# EAGLE board Panel (EAGLE 9.6.0)
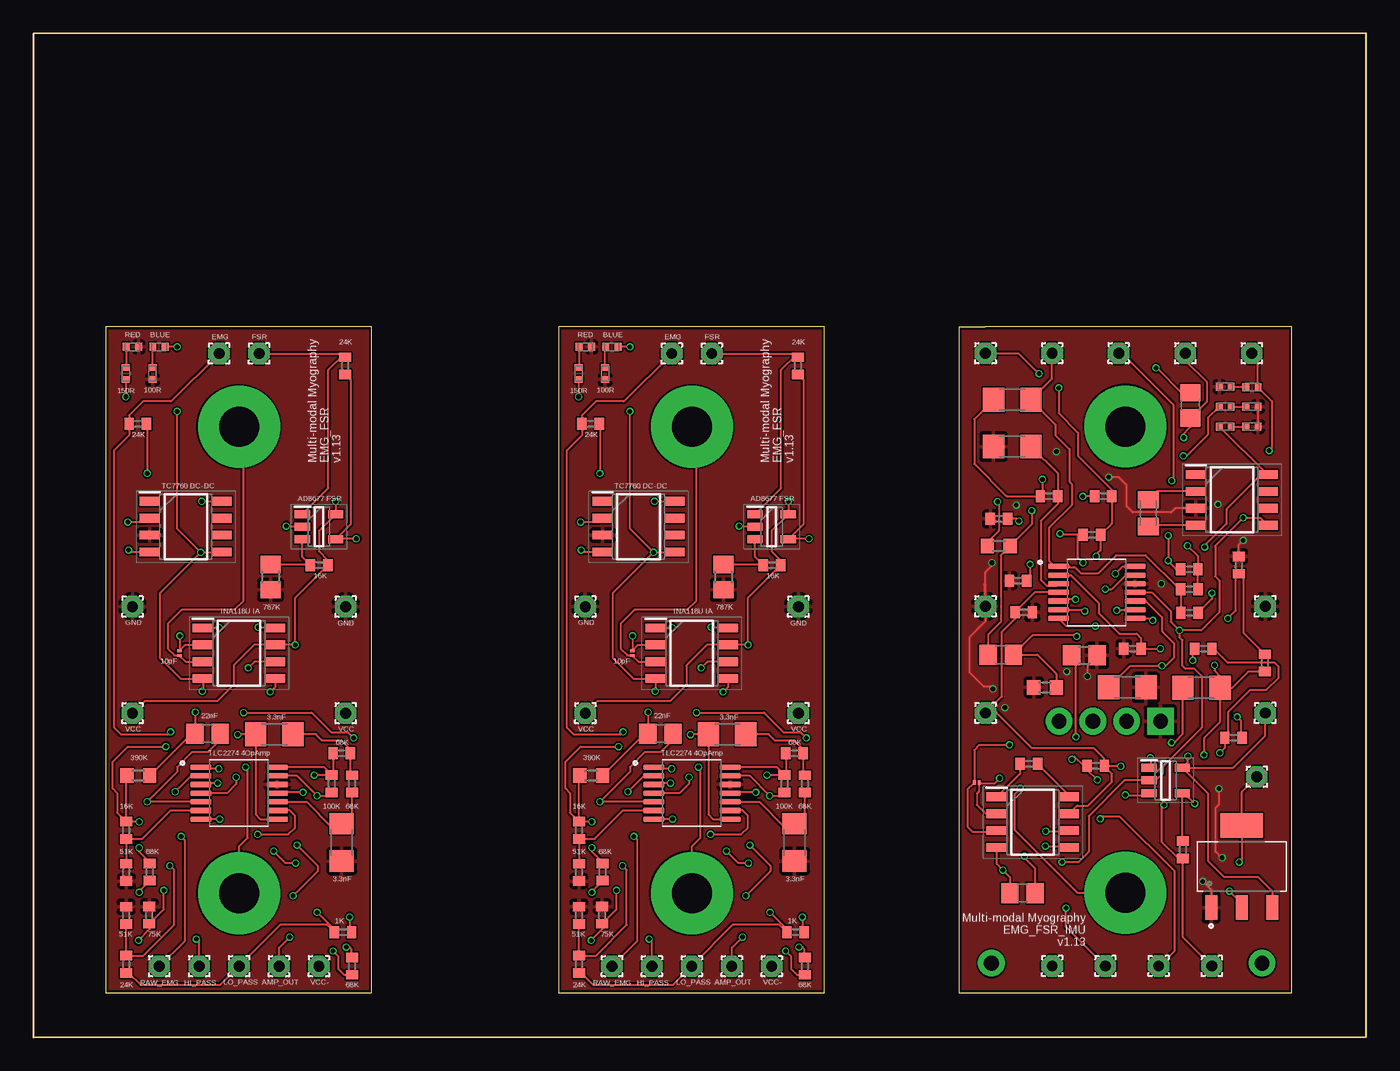
[diagram p0: board, top side]
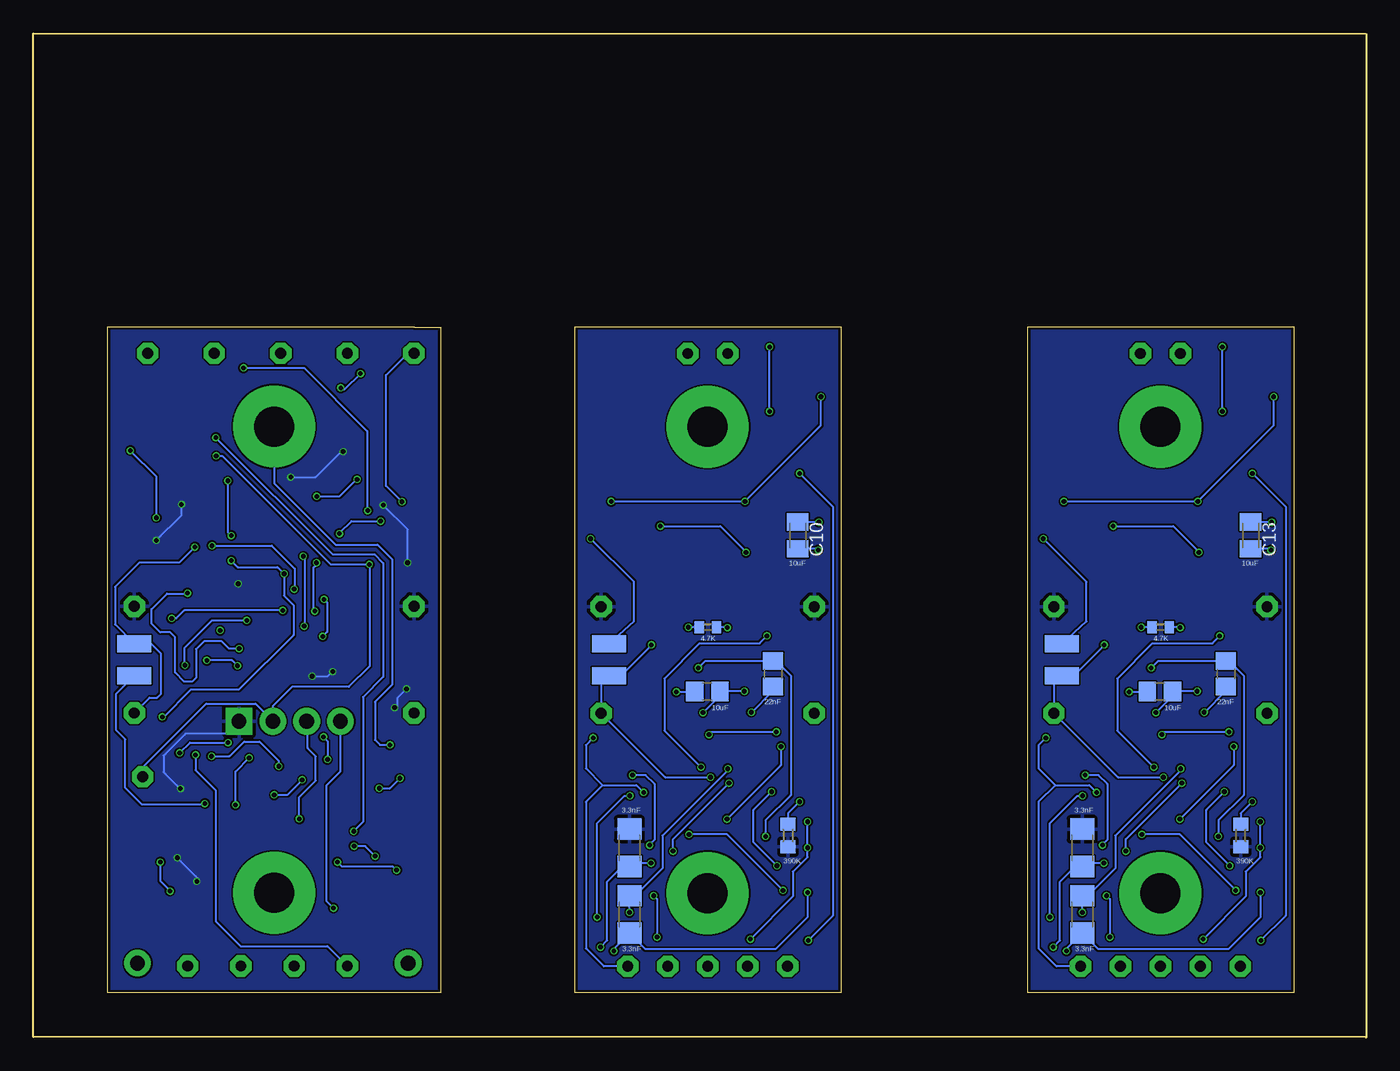
[diagram p1: board, bottom side, seen from below]

Size 100.09 x 75.38 mm. Coordinates in mm from the lower left corner, seen from the top.
Outline: 0,0 100.09,0.05 100.09,75.38 0,75.33 0,0
Outline: 5.45,3.34 25.4,3.34 25.4,53.34 5.45,53.34 5.45,3.34
Outline: 39.45,3.34 59.4,3.34 59.4,53.34 39.45,53.34 39.45,3.34
Outline: 69.5,3.36 94.5,3.36 94.5,53.36 71.5,53.36 71.47,53.33 69.5,53.33 69.5,3.36
Copper layers (1*16): Top 0.035559375mm / dielectric 1.6mm / Bottom 0.035559375mm
Design rules "jlcpcb2layer": minimum track width 5mil, minimum drill 12mil, track to track 5mil, track to pad 5mil, pad to pad 5mil, via to via 5mil, smd to smd 5mil, copper to edge 8mil, drill to drill 6mil, minimum pad ring 5mil, minimum via ring 3mil, stop-mask expansion 2.5mil, vias tented up to drill 0mil, thermal gap 10mil

## Footprints (pad centres in the part's own frame; a part is rotated, then mirrored left to right if it is on the bottom)
1,6/0,8 = drill 0.813 pad 1.6 octagon: 1 0,0
RESC0402X40N = smd 0.51 x 0.6: 1 -0.465,0; 2 0.465,0
HPC0201 = smd 0.2 x 0.35: 1 -0.18,0; 2 0.18,0
C0805 = smd 1.3 x 1.5: 1 -0.95,0; 2 0.95,0
C1206 = smd 1.6 x 1.8: 1 -1.4,0; 2 1.4,0
C0805K = smd 1.3 x 1.6: 1 -1,0; 2 1,0
C0402 = smd 0.7 x 0.9: 1 -0.65,0; 2 0.65,0
SOIC127P600X175-8N = smd 1.5 x 0.65: 1 -2.7,1.905; 2 -2.7,0.635; 3 -2.7,-0.635; 4 -2.7,-1.905; 5 2.7,-1.905; 6 2.7,-0.635; 7 2.7,0.635; 8 2.7,1.905
SOT95P280X100-5N = smd 1.15 x 0.6: 1 -1.25,0.95; 2 -1.25,0; 3 -1.25,-0.95; 4 1.25,-0.95; 5 1.25,0.95
SOIC127P600X175-8N' = smd 1.528 x 0.65: 1 -2.711,1.905; 2 -2.711,0.635; 3 -2.711,-0.635; 4 -2.711,-1.905; 5 2.711,-1.905; 6 2.711,-0.635; 7 2.711,0.635; 8 2.711,1.905
IMU = drill 1.1 pad 2: +3.3V -14.097,0; P$1 4.064,10.16; P$2 4.064,-10.16; SCL -14.097,-5.08; SDA -14.097,-2.54 | drill 1.1 pad 2 square: GND -14.097,2.54
SMD1,27-2,54 = smd 1.27 x 2.54: 1 0,0
R0402 = smd 0.7 x 0.9: 1 -0.65,0; 2 0.65,0
R0805 = smd 1.3 x 1.5: 1 -0.95,0; 2 0.95,0
R1005 = smd 0.7 x 0.9: 1 -0.65,0; 2 0.65,0
R0603 = smd 1 x 1.1: 1 -0.85,0; 2 0.85,0
RESC1005X40N = smd 0.51 x 0.6: 1 -0.445,0; 2 0.445,0
SOT230P700X180-4N = smd 1.86 x 0.9: 1 -3.075,2.3; 2 -3.075,0; 3 -3.075,-2.3 | smd 1.86 x 3.19: 4 3.075,0
SOP65P640X120-14N = smd 1.57 x 0.41: 1 -2.87,1.95; 2 -2.87,1.3; 3 -2.87,0.65; 4 -2.87,0; 5 -2.87,-0.65; 6 -2.87,-1.3; 7 -2.87,-1.95; 8 2.87,-1.95; 9 2.87,-1.3; 10 2.87,-0.65; 11 2.87,0; 12 2.87,0.65; 13 2.87,1.3; 14 2.87,1.95
EMG_VIA = drill 3 pad 6.15: P$1 0,0

## Placement (x,y rotation side)
+3.3V1  [1,6/0,8]  91.88,19.57 0 top
AMP_OUT  [1,6/0,8]  18.45,5.34 0 top
AMP_OUT1  [1,6/0,8]  52.45,5.34 0 top
AMP_OUT4  [1,6/0,8]  81.5,51.36 0 top
BLUE  RESC0402X40N  [RESC0402X40N]  9.45,51.84 0 top
BLUE1  RESC0402X40N  [RESC0402X40N]  43.45,51.84 0 top
BLUE4  RESC0402X40N  [RESC0402X40N]  91.5,48.81 0 top
C1  10pF  [HPC0201]  10.97,28.85 270 top
C2  10uF  [C0805]  15.48,25.97 180 bottom
C3  10pF  [HPC0201]  44.97,28.85 270 top
C4  3.3nF  [C1206]  21.32,9.24 90 bottom
C5  3.3nF  [C1206]  21.33,14.24 270 bottom
C6  22nF  [C0805]  13.09,22.81 0 top
C7  22nF  [C0805]  10.53,27.3 270 bottom
C8  3.3nF  [C1206]  23.17,14.64 270 top
C9  3.3nF  [C1206]  18.1,22.77 180 top
C10  10uF  [C0805K]  42.68,37.69 270 bottom
C11  10uF  [C0805]  49.48,25.97 180 bottom
C12  3.3nF  [C1206]  55.32,9.24 90 bottom
C13  10uF  [C0805K]  8.68,37.69 270 bottom
C14  3.3nF  [C1206]  55.33,14.24 270 bottom
C15  22nF  [C0805]  47.09,22.81 0 top
C16  22nF  [C0805]  44.53,27.3 270 bottom
C17  3.3nF  [C1206]  57.17,14.64 270 top
C18  3.3nF  [C1206]  52.1,22.77 180 top
C39  10pF  [HPC0201]  70.84,19.13 180 top
C40  1uF  [C0402]  73.94,34.29 180 top
C41  1uF  [C0402]  74.37,31.91 0 top
C42  10uF  [C0805K]  83.72,39.36 270 top
C43  10uF  [C0805]  74.28,10.83 0 top
C44  3.3nF  [C1206]  73.5,47.86 0 top
C45  3.3nF  [C1206]  73.5,44.36 0 top
C46  22nF  [C0805]  72.64,28.73 0 top
C47  22nF  [C0805]  86.89,47.45 90 top
C48  3.3nF  [C1206]  82.16,26.28 0 top
C49  3.3nF  [C1206]  87.72,26.25 0 top
EMG_BASIC  [1,6/0,8]  13.95,51.34 0 top
EMG_BASIC1  [1,6/0,8]  47.95,51.34 0 top
EMG_OUT1  [1,6/0,8]  76.5,5.36 0 top
FSR_OUT  [1,6/0,8]  16.95,51.34 0 top
FSR_OUT1  [1,6/0,8]  50.95,51.34 0 top
FSR_OUT4  [1,6/0,8]  88.5,5.36 0 top
GND  0V  [1,6/0,8]  7.45,32.34 0 top
GND1  0V  [1,6/0,8]  23.45,32.34 0 top
GND2  0V  [1,6/0,8]  41.45,32.34 0 top
GND3  0V  [1,6/0,8]  57.45,32.34 0 top
GND8  0V  [1,6/0,8]  71.5,32.36 0 top
GND9  0V  [1,6/0,8]  92.5,32.36 0 top
HI_PASS  [1,6/0,8]  12.45,5.34 0 top
HI_PASS1  [1,6/0,8]  46.45,5.34 0 top
HI_PASS4  [1,6/0,8]  71.5,51.36 0 top
IC1  TC7660SEOA  [SOIC127P600X175-8N]  11.45,38.34 0 top
IC2  AD8677AUJZ-REEL7  [SOT95P280X100-5N]  21.45,38.34 0 top
IC3  INA118U_2K5  [SOIC127P600X175-8N']  15.45,28.84 0 top
IC4  TC7660SEOA  [SOIC127P600X175-8N]  45.45,38.34 0 top
IC5  AD8677AUJZ-REEL7  [SOT95P280X100-5N]  55.45,38.34 0 top
IC6  INA118U_2K5  [SOIC127P600X175-8N']  49.45,28.84 0 top
IC13  TC7660SEOA  [SOIC127P600X175-8N]  90,40.36 0 top
IC14  AD8677AUJZ-REEL7  [SOT95P280X100-5N]  85.03,19.3 0 top
IC15  INA118U_2K5  [SOIC127P600X175-8N']  75.06,16.16 0 top
IMU1  IMU  [IMU]  82.11,9.64 270 top
LO_PASS  [1,6/0,8]  15.45,5.34 0 top
LO_PASS1  [1,6/0,8]  49.45,5.34 0 top
LO_PASS4  [1,6/0,8]  76.5,51.36 0 top
ORANGE1  RESC0402X40N  [RESC0402X40N]  91.5,47.36 0 top
PAD1  [SMD1,27-2,54]  22.85,29.54 270 bottom
PAD2  [SMD1,27-2,54]  22.85,27.14 90 bottom
PAD3  [SMD1,27-2,54]  56.85,29.54 270 bottom
PAD4  [SMD1,27-2,54]  56.85,27.14 90 bottom
PAD9  [SMD1,27-2,54]  92.5,27.16 270 bottom
PAD10  [SMD1,27-2,54]  92.5,29.56 270 bottom
R1  75K  [R0402]  8.72,9.18 270 top
R2  51K  [R0402]  6.97,9.16 270 top
R3  787K  [R0805]  17.82,34.56 270 top
R4  4.7K  [R0402]  15.44,30.81 180 bottom
R5  75K  [R0402]  42.72,9.18 270 top
R6  51K  [R0402]  6.98,12.39 90 top
R7  100K  [R1005]  22.42,19.05 270 top
R8  16K  [R0402]  21.47,35.46 0 top
R9  16K  [R0402]  6.97,15.55 270 top
R10  68K  [R0402]  8.73,12.42 90 top
R11  390K  [R0603]  9.42,15.16 90 bottom
R12  390K  [R0603]  7.89,19.66 0 top
R13  1K  [R0402]  23.25,7.91 0 top
R14  68K  [R0402]  23.93,5.36 90 top
R15  68K  [R0402]  42.73,12.42 90 top
R16  390K  [R0603]  43.42,15.16 90 bottom
R17  68K  [R0402]  23.16,21.32 180 top
R18  390K  [R0603]  41.89,19.66 0 top
R19  ERJ-2RKF1500X  [RESC1005X40N]  8.95,49.84 270 top
R20  1K  [R0402]  57.25,7.91 0 top
R21  24K  [R0402]  6.98,5.5 90 top
R22  ERJ-2RKF1500X  [RESC1005X40N]  6.95,49.84 270 top
R23  68K  [R0402]  57.93,5.36 90 top
R24  24K  [R0402]  23.42,50.41 270 top
R25  24K  [R0402]  7.85,46.06 0 top
R26  68K  [R0402]  23.93,19.03 90 top
R27  68K  [R0402]  57.16,21.32 180 top
R28  ERJ-2RKF1500X  [RESC1005X40N]  42.95,49.84 270 top
R29  51K  [R0402]  40.97,9.16 270 top
R30  24K  [R0402]  40.98,5.5 90 top
R31  ERJ-2RKF1500X  [RESC1005X40N]  40.95,49.84 270 top
R32  24K  [R0402]  57.42,50.41 270 top
R33  24K  [R0402]  41.85,46.06 0 top
R34  68K  [R0402]  57.93,19.03 90 top
R35  787K  [R0805]  51.82,34.56 270 top
R36  4.7K  [R0402]  49.44,30.81 180 bottom
R37  51K  [R0402]  40.98,12.39 90 top
R38  100K  [R1005]  56.42,19.05 270 top
R39  16K  [R0402]  55.47,35.46 0 top
R40  16K  [R0402]  40.97,15.55 270 top
R82  75K  [R0402]  90.53,35.46 270 top
R83  68K  [R0402]  80.33,40.63 0 top
R84  390K  [R0603]  75.97,26.28 0 top
R85  390K  [R0603]  72.5,36.88 0 top
R86  1K  [R0402]  86.81,33.63 0 top
R87  68K  [R0402]  76.28,40.63 0 top
R88  68K  [R0402]  90.13,22.5 0 top
R89  ERJ-2RKF1500X  [RESC1005X40N]  89.5,48.86 180 top
R90  51K  [R0402]  82.53,29.18 0 top
R91  24K  [R0402]  86.81,31.88 0 top
R92  ERJ-2RKF1500X  [RESC1005X40N]  89.5,45.86 180 top
R93  ERJ-2RKF1500X  [RESC1005X40N]  89.5,47.36 180 top
R94  24K  [R0402]  86.33,14.09 90 top
R95  24K  [R0402]  92.48,28.11 90 top
R96  68K  [R0402]  87.84,29.18 0 top
R97  787K  [R0805]  78.92,28.69 0 top
R98  4.7K  [R0402]  74.77,20.53 0 top
R99  51K  [R0402]  72.5,38.93 0 top
R100  100K  [R1005]  86.8,35.13 0 top
R101  16K  [R0402]  79.78,20.38 0 top
R102  16K  [R0402]  79.5,37.73 180 top
RAWEMG  [1,6/0,8]  9.45,5.34 0 top
RAWEMG1  [1,6/0,8]  43.45,5.34 0 top
RAWEMG4  [1,6/0,8]  86.5,51.36 0 top
RED  RESC0402X40N  [RESC0402X40N]  7.45,51.84 0 top
RED1  RESC0402X40N  [RESC0402X40N]  41.45,51.84 0 top
RED4  RESC0402X40N  [RESC0402X40N]  91.5,45.86 0 top
SCL1  [1,6/0,8]  80.5,5.36 0 top
SDA1  [1,6/0,8]  84.5,5.36 0 top
U2  AZ1117EH-3.3TRG1  [SOT230P700X180-4N]  90.75,12.83 90 top
U$1  TLC2274-HT  [SOP65P640X120-14N]  15.45,18.34 0 top
U$2  EMG_VIA  [EMG_VIA]  15.45,10.84 0 top
U$3  EMG_VIA  [EMG_VIA]  15.45,45.84 0 top
U$4  TLC2274-HT  [SOP65P640X120-14N]  49.45,18.34 0 top
U$5  EMG_VIA  [EMG_VIA]  49.45,10.84 0 top
U$6  EMG_VIA  [EMG_VIA]  49.45,45.84 0 top
U$13  TLC2274-HT  [SOP65P640X120-14N]  79.86,33.41 0 top
U$14  EMG_VIA  [EMG_VIA]  82,10.86 0 top
U$15  EMG_VIA  [EMG_VIA]  82,45.86 0 top
VCC  +5V  [1,6/0,8]  7.45,24.34 0 top
VCC1  +5V  [1,6/0,8]  23.45,24.34 0 top
VCC2  +5V  [1,6/0,8]  41.45,24.34 0 top
VCC3  +5V  [1,6/0,8]  57.45,24.34 0 top
VCC8  +5V  [1,6/0,8]  71.5,24.36 0 top
VCC9  +5V  [1,6/0,8]  92.5,24.36 0 top
VCC-  -5V  [1,6/0,8]  21.45,5.34 0 top
VCC-1  -5V  [1,6/0,8]  55.45,5.34 0 top
VCC-4  -5V  [1,6/0,8]  91.5,51.36 0 top

## Library data of the parts
+3.3V1 AMP_OUT AMP_OUT1 AMP_OUT4 EMG_BASIC EMG_BASIC1 EMG_OUT1 FSR_OUT FSR_OUT1 FSR_OUT4 GND GND1-GND3 GND8 GND9 HI_PASS HI_PASS1 HI_PASS4 LO_PASS LO_PASS1 LO_PASS4 PAD1-PAD4 PAD9 PAD10 RAWEMG RAWEMG1 RAWEMG4 SCL1 SDA1 VCC VCC1-VCC3 VCC8 VCC9 VCC- VCC-1 VCC-4 = wirepad
BLUE BLUE1 BLUE4 ORANGE1 RED RED1 RED4 = RESC0402X40N; A_MAX: 0.4; A_MIN: 0.4; A_NOM: 0.4; D_MAX: 1.1; D_MIN: 0.95; D_NOM: 1.0; E_MAX: 0.55; E_MIN: 0.45; E_NOM: 0.5; L1_MAX: 0.3; L1_MIN: 0.15; L1_NOM: 0.25; L_MAX: 0.3; L_MIN: 0.15; L_NOM: 0.25; MANUFACTURER: KOA; STANDARD: IPC 7351B
C1-C3 C10 C11 C13 C39-C49 = rcl; SPICEPREFIX: C
C4-C9 C12 C14-C18 = rcl@1; SPICEPREFIX: C
IC1 IC4 IC13 = TC7660SEOA; ARROW_PART_NUMBER: TC7660SEOA; ARROW_PRICE-STOCK: https://www.arrow.com/en/products/tc7660seoa/microchip-technology; DESCRIPTION: DC-TO-DC VOLTAGE CONVERTER; HEIGHT: 1.75mm; MANUFACTURER_NAME: Microchip; MANUFACTURER_PART_NUMBER: TC7660SEOA; MOUSER_PART_NUMBER: 579-TC7660SEOA; MOUSER_PRICE-STOCK: https://www.mouser.co.uk/ProductDetail/Microchip-Technology/TC7660SEOA?qs=cQYLKLPzRJl3hJI5k2EAHg%3D%3D
IC2 IC5 IC14 = AD8677AUJZ-REEL7; ARROW_PART_NUMBER: AD8677AUJZ-REEL7; ARROW_PRICE-STOCK: https://www.arrow.com/en/products/ad8677aujz-reel7/analog-devices; DESCRIPTION: Precision Amplifiers 130uV Max Offset VTG; HEIGHT: 1mm; MANUFACTURER_NAME: Analog Devices; MANUFACTURER_PART_NUMBER: AD8677AUJZ-REEL7; MOUSER_PART_NUMBER: 584-AD8677AUJZ-R7; MOUSER_PRICE-STOCK: https://www.mouser.co.uk/ProductDetail/Analog-Devices/AD8677AUJZ-REEL7?qs=%2FtpEQrCGXCxIKHu%2FfOAijA%3D%3D
IC3 IC6 IC15 = INA118U_2K5; ARROW_PART_NUMBER: INA118U/2K5; ARROW_PRICE-STOCK: https://www.arrow.com/en/products/ina118u2k5/texas-instruments; DESCRIPTION: Precision, Low Power Instrumentation Amplifier; HEIGHT: 1.75mm; MANUFACTURER_NAME: Texas Instruments; MANUFACTURER_PART_NUMBER: INA118U/2K5; MOUSER_PART_NUMBER: 595-INA118U/2K5; MOUSER_PRICE-STOCK: https://www.mouser.co.uk/ProductDetail/Texas-Instruments/INA118U-2K5?qs=VBduBm9rCJRVtE6eJbSA%2Fg%3D%3D
IMU1 = IMU
R1 R2 R5 R6 R8-R10 R13-R15 R17 R20 R21 R23-R27 R29 R30 R32-R34 R37 R39 R40 R82-R84 R86-R88 R90 R91 R94-R96 R99 R101 R102 = adafruit
R3 R35 = rcl@1; SPICEPREFIX: R
R4 R7 R12 R18 R36 R38 = adafruit@2
R11 R16 R85 R98 R100 = adafruit@1
R19 R22 R28 R31 R89 R92 R93 = ERJ-2RKF1500X; DESCRIPTION: 150 Ohms ±1% 0.1W, 1/10W Chip Resistor 0402 (1005 Metric) Automotive AEC-Q200 Thick Film; DIGI-KEY_PART_NUMBER: P150LCT-ND; MF: Panasonic Electronic; MP: ERJ-2RKF1500X; PACKAGE: 1005 Panasonic Electronic Components; PURCHASE-URL: https://pricing.snapeda.com/search/part/ERJ-2RKF1500X/?ref=eda
R97 = rcl; SPICEPREFIX: R
U2 = AZ1117EH-3.3TRG1; DESCRIPTION: Linear Voltage Regulator IC 1 Output 1A SOT-223; DIGI-KEY_PART_NUMBER: AZ1117EH-3.3TRG1DICT-ND; MF: Diodes Inc.; MP: AZ1117EH-3.3TRG1; PACKAGE: SOT-223 Diodes Inc.; PURCHASE-URL: https://pricing.snapeda.com/search/part/AZ1117EH-3.3TRG1/?ref=eda
U$1 U$4 U$13 = TLC2274-HT
U$2 U$3 U$5 U$6 U$14 U$15 = EMG_VIA

## Nets
+3.3V1: +3.3V1.1 C40.1 IMU1.+3.3V R93.2 U2.2 U2.4
+5V: IC1.8 IC2.5 IC3.7 PAD2.1 R8.2 R22.2 U$1.4 VCC1.1 VCC.1
+5V1: IC4.8 IC5.5 IC6.7 PAD4.1 R31.2 R39.2 U$4.4 VCC2.1 VCC3.1
+5V4: C41.1 IC13.8 IC14.5 IC15.7 PAD10.1 R92.2 R101.2 U2.3 U$13.4 VCC8.1 VCC9.1
-5V: BLUE.2 C2.1 IC1.5 IC2.2 IC3.4 U$1.11 VCC-.1
-5V1: BLUE1.2 C11.1 IC4.5 IC5.2 IC6.4 U$4.11 VCC-1.1
-5V4: BLUE4.2 C43.1 IC13.5 IC14.2 IC15.4 U$13.11 VCC-4.1
EMG_BASIC: C9.2 EMG_BASIC.1 R25.1 U$1.8
EMG_BASIC1: C18.2 EMG_BASIC1.1 R33.1 U$4.8
EMG_BASIC4: C49.2 EMG_OUT1.1 R95.1 U$13.8
FSR_OUT: FSR_OUT.1 IC2.1 R24.1
FSR_OUT1: FSR_OUT1.1 IC5.1 R32.1
FSR_OUT4: FSR_OUT4.1 IC14.1 R94.1
GND: C5.1 C8.2 GND1.1 GND.1 IC1.3 R1.1 R2.1 R3.2 R6.1 R11.1 R19.2 RED.2 U$1.12
GND1: C14.1 C17.2 GND2.1 GND3.1 IC4.3 R5.1 R16.1 R28.2 R29.1 R35.2 R37.1 RED1.2 U$4.12
GND4: C40.2 C41.2 C45.1 C48.2 GND8.1 GND9.1 IC13.3 IMU1.GND ORANGE1.2 R82.1 R84.1 R89.2 R90.1 R97.2 R99.1 RED4.2 U2.1 U$13.12
N$1: C13.1 IC1.2
N$2: C13.2 IC1.4
N$3: C1.1 IC3.2 U$2.P$1
N$4: R22.1 RED.1
N$5: C1.2 IC3.3 U$3.P$1
N$6: BLUE.1 R19.1
N$7: IC2.4 PAD1.1 R24.2
N$8: C10.1 IC4.2
N$9: C10.2 IC4.4
N$10: IC2.3 R3.1 R8.1
N$11: C2.2 IC3.5
N$12: IC3.1 R4.1
N$13: IC3.8 R4.2
N$14: C4.2 LO_PASS.1 R13.1 R21.1 U$1.1
N$15: IC5.4 PAD3.1 R32.2
N$16: IC5.3 R35.1 R39.1
N$17: AMP_OUT.1 R7.1 R17.2 U$1.14
N$18: R7.2 R13.2 U$1.13
N$19: R2.2 R21.2 U$1.2
N$20: C5.2 R14.2 U$1.3
N$21: C4.1 R10.1 R14.1
N$22: C3.1 IC6.2 U$5.P$1
N$23: C6.1 C7.2 R12.2
N$24: C6.2 R11.2 U$1.5
N$25: C11.2 IC6.5
N$26: R6.2 R9.2 U$1.6
N$27: C9.1 R17.1 R26.2
N$28: C8.1 R26.1 U$1.10
N$29: IC6.1 R36.1
N$30: R1.2 R25.2 U$1.9
N$31: IC6.8 R36.2
N$32: C12.2 LO_PASS1.1 R20.1 R30.1 U$4.1
N$33: AMP_OUT1.1 R27.2 R38.1 U$4.14
N$34: R20.2 R38.2 U$4.13
N$35: R29.2 R30.2 U$4.2
N$36: C14.2 R23.2 U$4.3
N$37: C12.1 R15.1 R23.1
N$38: C15.2 R16.2 U$4.5
N$39: C15.1 C16.2 R18.2
N$40: R37.2 R40.2 U$4.6
N$41: C18.1 R27.1 R34.2
N$42: C17.1 R34.1 U$4.10
N$43: R5.2 R33.2 U$4.9
N$44: R31.1 RED1.1
N$45: BLUE1.1 R28.1
N$46: C3.2 IC6.3 U$6.P$1
N$96: C42.1 IC13.2
N$97: C42.2 IC13.4
N$98: IC14.4 PAD9.1 R94.2
N$99: IC14.3 R97.1 R101.1
N$100: C39.1 IC15.2 U$14.P$1
N$101: C43.2 IC15.5
N$102: IC15.1 R98.1
N$103: IC15.8 R98.2
N$104: C44.2 LO_PASS4.1 R86.1 R91.1 U$13.1
N$105: AMP_OUT4.1 R88.2 R100.1 U$13.14
N$106: R86.2 R100.2 U$13.13
N$107: R90.2 R91.2 U$13.2
N$108: C45.2 R87.2 U$13.3
N$109: C44.1 R83.1 R87.1
N$110: C46.2 R84.2 U$13.5
N$111: C46.1 C47.2 R85.2
N$112: R99.2 R102.2 U$13.6
N$113: C49.1 R88.1 R96.2
N$114: C48.1 R96.1 U$13.10
N$115: R82.2 R95.2 U$13.9
N$116: R92.1 RED4.1
N$117: BLUE4.1 R89.1
N$118: C39.2 IC15.3 U$15.P$1
N$119: IMU1.SDA SDA1.1
N$120: IMU1.SCL SCL1.1
N$121: ORANGE1.1 R93.1
PIN1: HI_PASS1.1 R15.2 R18.1 R40.1 U$4.7
PIN4: HI_PASS4.1 R83.2 R85.1 R102.1 U$13.7
PIN7: HI_PASS.1 R9.1 R10.2 R12.1 U$1.7
RAWEMG: C7.1 IC3.6 RAWEMG.1
RAWEMG1: C16.1 IC6.6 RAWEMG1.1
RAWEMG4: C47.1 IC15.6 RAWEMG4.1

## Tracks (layer width: path | path; a pad name or v marks a point on that pad's centre or on a via)
+3.3V1  (via drill 0.35)
  Top 0.152: R93.2 88.2,46.5 88.2,45.26 86.61,43.66 v86.36,43.66 | v74.86,35.51 74.86,34.6 74.59,34.34 C40.1 | +3.3V1.1 90.75,18.44 U2.4 90.75,13.15 90.66,13.06 v90.56,13.16 | v89.83,10.98 90.75,10.07 U2.2
  Bottom 0.152: v86.36,43.66 85.91,43.66 77.75,35.5 v74.86,35.5 v74.86,35.51 74.86,27.86 76.41,26.31 80.66,26.31 82.11,24.86 82.11,23.76 | v90.56,13.16 90.56,11.76 89.81,11.01 v89.83,10.98 | 82.11,23.76 IMU1.+3.3V | +3.3V1.1 91.88,20.29 87.11,25.06 83.41,25.06 82.11,23.76
+5V  (via drill 0.35)
  Top 0.152: v12.65,40.24 IC1.8 | R22.2 v6.95,48.09 | v22.7,40.24 IC2.5 21.45,38.04 21.45,36.49 22.12,35.82 R8.2 19.68,33.01 v19.68,29.46 18.17,29.46 IC3.7 16.59,29.47 15.05,27.94 15.05,26.49 13.8,25.24 8.35,25.24 VCC.1 | v15.23,19.53 15.23,19.03 14.54,18.34 U$1.4
  Bottom 0.152: v19.68,29.46 19.65,29.44 21.8,27.29 PAD2.1 23.45,26.74 VCC1.1 18.64,19.53 v15.23,19.53 | v22.7,40.24 v12.65,40.24 6.95,45.94 v6.95,48.09
+5V1  (via drill 0.35)
  Top 0.152: v46.65,40.24 v46.66,40.24 IC4.8 | R31.2 v40.95,48.09 | v56.7,40.24 IC5.5 55.45,38.04 55.45,36.49 56.12,35.82 R39.2 53.67,33.01 v53.67,29.46 52.17,29.46 IC6.7 50.59,29.47 49.05,27.94 49.05,26.49 47.8,25.24 42.35,25.24 VCC2.1 | v49.23,19.53 49.23,19.03 48.54,18.34 U$4.4
  Bottom 0.152: v53.67,29.46 53.65,29.44 55.8,27.29 PAD4.1 57.45,26.74 VCC3.1 52.64,19.53 v49.23,19.53 | v56.7,40.24 v46.65,40.24 40.95,45.94 v40.95,48.09
+5V4  (via drill 0.35)
  Top 0.152: v87.95,36.81 87.91,36.86 89.61,38.56 89.61,39.66 92.21,42.26 IC13.8 92.66,42.26 R92.2 | VCC9.1 92.5,22.66 90.09,20.25 IC14.5 | IC14.5 88.2,18.33 88.2,13.26 89.41,12.06 91.95,12.06 93.05,10.97 U2.3 | VCC8.1 71.53,24.38 | 71.53,24.38 72.7,25.56 72.7,30.41 73.72,31.42 C41.1 75.21,33.41 U$13.4 | IC15.7 78.38,17.41 79.2,17.41 81,19.21 81,19.8 R101.2 | R101.2 81.64,20.38 v81.66,20.36 | IC14.5 86.7,20.67 v86.7,21.11 | R101.2 80.42,20.92 79.64,21.71 75,21.71 72.33,24.38 71.53,24.38
  Bottom 0.152: v86.7,21.11 85.36,21.11 84.25,22.21 83.11,22.21 81.66,20.76 v81.66,20.36 | v87.95,36.81 89.11,35.66 92.11,35.66 93.94,33.82 93.94,31 PAD10.1 91.25,29.56 90.5,28.81 90.5,25.81 90.81,25.51 91.36,25.51 VCC9.1
-5V  (via drill 0.35)
  Top 0.152: v19,38.39 19.05,38.34 IC2.2 | v12.57,36.41 14.13,36.41 IC1.5 | v12.57,36.41 10.8,38.19 v10.8,46.99 | v10.8,51.84 BLUE.2 | v20.25,18.39 18.37,18.39 U$1.11 | v12.57,36.41 9.5,33.34 9.5,28.49 11.05,26.93 IC3.4 12.74,26.03 v12.7,25.99 | v15.8,24.39 20.89,24.39 22.39,22.89 23.65,22.89 v24.05,22.49
  Bottom 0.152: v19,38.39 14.5,38.39 12.55,36.44 v12.57,36.41 | v10.8,46.99 v10.8,51.84 | VCC-.1 23.25,5.34 24.6,6.69 24.6,17.69 23.35,18.94 | v20.25,18.39 20.8,18.94 23.35,18.94 | v12.7,25.99 14.51,25.99 C2.1 14.53,25.66 v15.8,24.39 | v24.05,22.49 24.6,21.94 24.6,20.19 23.35,18.94
-5V1  (via drill 0.35)
  Top 0.152: v53,38.39 53.05,38.34 IC5.2 | v46.58,36.41 48.13,36.41 IC4.5 | v46.58,36.41 44.8,38.19 v44.8,46.99 | v44.8,51.84 BLUE1.2 | v54.25,18.39 52.37,18.39 U$4.11 | v46.58,36.41 43.5,33.34 43.5,28.49 45.05,26.93 IC6.4 46.74,26.03 v46.7,25.99 | v49.8,24.39 54.88,24.39 56.38,22.89 57.65,22.89 v58.05,22.49
  Bottom 0.152: v53,38.39 48.5,38.39 46.55,36.44 v46.58,36.41 | v44.8,46.99 v44.8,51.84 | VCC-1.1 57.25,5.34 58.6,6.69 58.6,17.69 57.35,18.94 | v54.25,18.39 54.8,18.94 57.35,18.94 | v46.7,25.99 48.51,25.99 C11.1 48.53,25.66 v49.8,24.39 | v58.05,22.49 58.6,21.94 58.6,20.19 57.35,18.94
-5V4  (via drill 0.35)
  Top 0.152: VCC-4.1 91.97,50.89 BLUE4.2 93,47.77 93,44.26 v92.81,44.06 | IC13.5 92.15,39.01 v90.86,39.01 88.75,36.91 88.75,34.61 89.06,34.31 89.06,31.91 87.7,30.56 v86.06,30.56 | v77.25,13.16 78.46,13.16 79.25,13.95 79.25,16.61 81.94,19.3 IC14.2 84.3,19.3 84.81,19.81 84.81,20.31 87.75,23.25 87.75,27.11 87.19,27.67 86.52,27.67 86.29,27.9 86.29,29.82 86.06,30.06 v86.06,30.56 | IC15.4 72.34,13.02 v72.81,12.56 73.33,12.03 C43.1 | v86.06,30.56 85.41,31.21 85.41,32.01 84,33.41 U$13.11
  Bottom 0.152: v92.81,44.06 90.86,42.11 v90.86,39.01 | v77.25,13.16 76.94,12.85 73.09,12.85 v72.81,12.56
EMG_BASIC  (via drill 0.35)
  Top 0.152: U$1.8 17.05,16.39 16.7,16.74 C9.2 15.38,22.77 v15.35,22.74 | EMG_BASIC.1 10.35,47.74 8.25,47.74 7.2,46.69 R25.1 7.2,45.19 6.05,44.04 6.05,23.29 6.6,22.74 10.1,22.74 v10.3,22.94
  Bottom 0.152: v15.35,22.74 15.15,22.94 v10.3,22.94
EMG_BASIC1  (via drill 0.35)
  Top 0.152: U$4.8 51.05,16.39 50.7,16.74 C18.2 49.38,22.77 v49.35,22.74 | EMG_BASIC1.1 44.35,47.74 42.25,47.74 41.2,46.69 R33.1 41.2,45.19 40.05,44.04 40.05,23.29 40.6,22.74 44.1,22.74 v44.3,22.94
  Bottom 0.152: v49.35,22.74 49.15,22.94 v44.3,22.94
EMG_BASIC4  (via drill 0.35)
  Top 0.152: C49.2 90.03,26.25 91.23,27.46 R95.1 | C49.2 89.11,23.67 87.91,22.46 v87.91,21.21 | U$13.8 83.75,31.46 83.95,31.26 84,31.26 v84.06,31.31 | v88.7,27.94 88.7,27.53 89.11,27.12 C49.2
  Bottom 0.152: v87.91,21.21 87.91,20.06 86.39,18.54 86.39,8.71 84.53,6.86 78,6.86 EMG_OUT1.1 | v88.7,27.94 88.7,29.26 86.66,31.31 v84.06,31.31
FSR_OUT
  Top 0.152: R24.1 23.5,51.06 23.3,51.26 | IC2.1 22.15,41.24 22.15,50.11 23.3,51.26 | FSR_OUT.1 23.22,51.34 23.3,51.26
FSR_OUT1
  Top 0.152: R32.1 57.5,51.06 57.3,51.26 | IC5.1 56.15,41.24 56.15,50.11 57.3,51.26 | FSR_OUT1.1 57.22,51.34 57.3,51.26
FSR_OUT4  (via drill 0.35)
  Top 0.152: FSR_OUT4.1 86.33,7.53 R94.1 85.98,13.44 84.75,14.66 84.75,17.46 v84.91,17.46 | v83.88,20.98 83.93,20.93 83.93,20.39 IC14.1
  Bottom 0.152: v84.91,17.46 84.91,19.96 v83.88,20.98
GND
  pour Top: 5.45,53.34 25.4,53.34 25.4,3.34 5.45,3.34
  pour Bottom: 5.45,53.34 25.4,53.34 25.4,3.34 5.45,3.34
GND1
  pour Top: 39.45,53.34 59.4,53.34 59.4,3.34 39.45,3.34
  pour Bottom: 39.45,53.34 59.4,53.34 59.4,3.34 39.45,3.34
GND4  (via drill 0.35)
  Top 0.152: ORANGE1.2 RED4.2 | R97.2 79.16,27.97 v79.16,27.11 | R82.1 90.53,36.98 v90.86,37.31 | GND8.1 71.5,33.91 71.41,34.01 71.41,32.46 GND8.1 | GND8.1 71.5,34.91 72.11,35.51 v71.98,35.63 | v89.03,18.68 89.03,17.48 88.75,17.21 88.75,13.96 89.25,13.46 v89.28,13.48 | v87.81,11.71 88.44,11.07 U2.1 | IC13.3 85.77,39.72 85.45,39.41 82.56,39.41 82.11,39.86 82.11,41.46 81.5,42.06 v80.75,42.06 | GND8.1 71.5,31.26 70.31,30.06 70.31,27.41 71.36,26.36 72.06,26.36 v72.06,26.16
  Bottom 0.152: v79.16,27.11 78,27.11 77.66,27.46 v77.61,27.46 | v90.86,37.31 88.95,39.21 v88.95,40.01 | v71.98,35.63 71.98,38.13 v73.81,39.96 | IMU1.GND 85.57,22.81 88.66,22.81 90.31,21.16 90.31,19.91 89.06,18.66 v89.03,18.68 | v89.28,13.48 87.75,11.96 87.75,11.71 v87.81,11.71 | v80.75,42.06 78.91,42.06 76.91,44.06 v76.83,43.98 | v72.06,26.16 72.75,25.46 72.75,24.76 v72.95,24.76
  other vias: 84.7,34.06
  pour Top: 69.5,53.36 69.5,3.36 94.5,3.36 94.5,53.36
  pour Bottom: 69.5,53.36 69.5,3.36 94.5,3.36 94.5,53.36
N$1  (via drill 0.35)
  Top 0.152: IC1.2 8.46,38.69 v7.1,38.69
  Bottom 0.152: v7.1,38.69 C13.1
N$2  (via drill 0.35)
  Top 0.152: IC1.4 7.3,36.43 v7.15,36.59
  Bottom 0.152: v7.15,36.59 7.25,36.69 C13.2
N$3  (via drill 0.35)
  Top 0.152: IC3.2 11.41,29.47 C1.1 11,29.06 v11,30.14 | U$2.P$1 15.45,14.34 16.1,14.99 16.1,20.29 v15.95,20.29
  Bottom 0.152: v15.95,20.29 18.7,23.04 18.7,26.94 16.05,29.59 11.55,29.59 v11,30.14
N$4
  Top 0.152: RED.1 6.99,50.32 R22.1
N$5
  Top 0.152: U$3.P$1 15.75,45.54 15.75,32.74 15.1,32.09 11.15,32.09 10.1,31.04 10.1,29.19 10.61,28.68 C1.2 11.45,28.19 12.72,28.19 IC3.3
N$6
  Top 0.152: R19.1 8.95,51.8 BLUE.1
N$7  (via drill 0.35)
  Top 0.152: R24.2 23.82,49.36 23.82,38.51 22.75,37.44 | 22.75,37.44 IC2.4 | v24.25,37.44 22.75,37.44
  Bottom 0.152: PAD1.1 21,31.24 21,34.19 v24.25,37.44
N$8  (via drill 0.35)
  Top 0.152: IC4.2 42.47,38.69 v41.1,38.69
  Bottom 0.152: v41.1,38.69 C10.1
N$9  (via drill 0.35)
  Top 0.152: IC4.4 41.3,36.43 v41.15,36.59
  Bottom 0.152: v41.15,36.59 41.25,36.69 C10.2
N$10
  Top 0.152: R3.1 20.77,35.51 R8.1 20.2,36.08 IC2.3
N$11  (via drill 0.35)
  Top 0.152: IC3.5 18.16,26.3 v17.8,25.94
  Bottom 0.152: v17.8,25.94 16.46,25.94 C2.2
N$12  (via drill 0.35)
  Top 0.152: IC3.1 13.95,30.74 v13.97,30.76
  Bottom 0.152: v13.97,30.76 14.02,30.81 R4.1
N$13  (via drill 0.35)
  Top 0.152: v16.9,30.79 18.12,30.79 IC3.8
  Bottom 0.152: R4.2 16.78,30.81 16.8,30.79 v16.9,30.79
N$14  (via drill 0.35)
  Top 0.152: v13.93,20.17 12.69,20.17 U$1.1 | R21.1 7.14,4.85 8.05,3.94 14.05,3.94 LO_PASS.1 15.45,5.39 18.52,8.46 22.05,8.46 R13.1 22.6,8.11 v21.32,9.39
  Bottom 0.152: v13.93,20.17 13.93,20.07 18.85,15.16 18.85,12.69 20.9,10.64 21.3,10.64 | 21.3,10.64 C4.2 | v21.32,9.39 21.32,10.62 21.3,10.64
N$15  (via drill 0.35)
  Top 0.152: R32.2 57.82,49.36 57.82,38.51 56.75,37.44 | 56.75,37.44 IC5.4 | v58.25,37.44 56.75,37.44
  Bottom 0.152: PAD3.1 55,31.24 55,34.19 v58.25,37.44
N$16
  Top 0.152: R35.1 54.77,35.51 R39.1 54.2,36.08 IC5.3
N$17  (via drill 0.35)
  Top 0.152: R7.1 21.83,20.29 U$1.14 | R17.2 22.51,19.79 R7.1 | AMP_OUT.1 18.45,6.74 v19.25,7.54 | v19.5,10.64 21.35,12.49 21.35,12.89 v19.8,14.44 | R7.1 v21.1,19.69
  Bottom 0.152: v19.25,7.54 19.25,10.39 v19.5,10.64 | v21.1,19.69 20.1,19.69 19.45,19.04 19.45,14.84 19.8,14.49 v19.8,14.44
N$18  (via drill 0.35)
  Top 0.152: R7.2 22.16,18.14 v21.3,18.14 19.8,19.64 U$1.13 | v23.75,9.04 23.75,8.06 R13.2
  Bottom 0.152: v23.75,9.04 23.75,16.09 21.7,18.14 v21.3,18.14
N$19  (via drill 0.35)
  Top 0.152: R2.2 R21.2 8.26,6.15 10.57,8.45 10.57,12.57 v10.25,12.89 | v10.65,18.44 11.85,19.64 U$1.2
  Bottom 0.152: v10.25,12.89 12,14.64 12,17.09 v10.65,18.44
N$20  (via drill 0.35)
  Top 0.152: R14.2 23.9,6.04 23.9,6.64 23.76,6.78 v23.5,6.78 | v13.85,19.09 12.68,19.09 U$1.3 | v19.7,13.09 18.95,13.09 v18.05,13.99
  Bottom 0.152: v23.5,6.78 23,7.28 23,11.69 21.85,12.84 C5.2 21.08,13.09 v19.7,13.09 | v18.05,13.99 18.05,14.89 v13.85,19.09
N$21  (via drill 0.35)
  Top 0.152: v22.5,6.49 22.9,6.09 22.9,5.14 23.33,4.71 R14.1 | v7.95,10.89 7.95,10.99 R10.1
  Bottom 0.152: v7.95,10.89 7.95,9.04 10.35,6.64 20.12,6.64 C4.1 22.5,6.66 v22.5,6.49
N$22  (via drill 0.35)
  Top 0.152: IC6.2 45.41,29.47 C3.1 45,29.06 v45,30.14 | U$5.P$1 49.45,14.34 50.1,14.99 50.1,20.29 v49.95,20.29
  Bottom 0.152: v49.95,20.29 52.7,23.04 52.7,26.94 50.05,29.59 45.55,29.59 v45,30.14
N$23  (via drill 0.35)
  Top 0.152: R12.2 11.89,22.81 C6.1 12.18,22.84 v12.18,24.41
  Bottom 0.152: C7.2 10.53,26.01 12.15,24.39 v12.18,24.41
N$24  (via drill 0.35)
  Top 0.152: C6.2 14.08,22.77 14.08,22.37 13.15,21.44 11.95,21.44 10.8,20.29 10.8,19.94 v8.55,17.69 U$1.5
  Bottom 0.152: v8.55,17.69 9.42,16.82 R11.2
N$25  (via drill 0.35)
  Top 0.152: IC6.5 52.16,26.3 v51.8,25.94
  Bottom 0.152: v51.8,25.94 50.46,25.94 C11.2
N$26
  Top 0.152: R6.2 R9.2 8.16,14.9 10.3,17.04 U$1.6
N$27
  Top 0.152: R26.2 23.81,19.8 R17.1 23.81,21.62 23.14,22.29 21.7,22.29 21.22,22.77 C9.1
N$28
  Top 0.152: U$1.10 20.52,17.69 22.42,15.79 22.92,15.79 C8.1 23.93,16.8 R26.1
N$29  (via drill 0.35)
  Top 0.152: IC6.1 47.95,30.74 v47.98,30.76
  Bottom 0.152: v47.98,30.76 48.02,30.81 R36.1
N$30  (via drill 0.35)
  Top 0.152: v9.8,11.04 9.8,9.61 R1.2 8.72,8.11 v7.9,7.29 | v16.85,15.24 19.15,15.24 19.65,15.74 19.65,16.64 19.25,17.04 U$1.9 | R25.2 8.55,46.01 v8.55,42.34
  Bottom 0.152: v9.8,11.04 14,15.24 v16.85,15.24 | v8.55,42.34 6.05,39.84 6.05,9.14 v7.9,7.29
N$31  (via drill 0.35)
  Top 0.152: v50.9,30.79 52.12,30.79 IC6.8
  Bottom 0.152: R36.2 50.78,30.81 50.8,30.79 v50.9,30.79
N$32  (via drill 0.35)
  Top 0.152: v47.93,20.17 46.69,20.17 U$4.1 | R30.1 41.14,4.85 42.05,3.94 48.05,3.94 LO_PASS1.1 49.45,5.39 52.52,8.46 56.05,8.46 R20.1 56.6,8.11 v55.32,9.39
  Bottom 0.152: v47.93,20.17 47.93,20.07 52.85,15.16 52.85,12.69 54.9,10.64 55.3,10.64 | 55.3,10.64 C12.2 | v55.32,9.39 55.32,10.62 55.3,10.64
N$33  (via drill 0.35)
  Top 0.152: R38.1 55.83,20.29 U$4.14 | R27.2 56.51,19.79 R38.1 | AMP_OUT1.1 52.45,6.74 v53.25,7.54 | v53.5,10.64 55.35,12.49 55.35,12.89 v53.8,14.44 | R38.1 v55.1,19.69
  Bottom 0.152: v53.25,7.54 53.25,10.39 v53.5,10.64 | v55.1,19.69 54.1,19.69 53.45,19.04 53.45,14.84 53.8,14.49 v53.8,14.44
N$34  (via drill 0.35)
  Top 0.152: R38.2 56.16,18.14 v55.3,18.14 53.8,19.64 U$4.13 | v57.75,9.04 57.75,8.06 R20.2
  Bottom 0.152: v57.75,9.04 57.75,16.09 55.7,18.14 v55.3,18.14
N$35  (via drill 0.35)
  Top 0.152: R29.2 R30.2 42.26,6.15 44.57,8.45 44.57,12.57 v44.25,12.89 | v44.65,18.44 45.85,19.64 U$4.2
  Bottom 0.152: v44.25,12.89 46,14.64 46,17.09 v44.65,18.44
N$36  (via drill 0.35)
  Top 0.152: R23.2 57.9,6.04 57.9,6.64 57.76,6.78 v57.5,6.78 | v47.85,19.09 46.68,19.09 U$4.3 | v53.7,13.09 52.95,13.09 v52.05,13.99
  Bottom 0.152: v57.5,6.78 57,7.28 57,11.69 55.85,12.84 C14.2 55.08,13.09 v53.7,13.09 | v52.05,13.99 52.05,14.89 v47.85,19.09
N$37  (via drill 0.35)
  Top 0.152: v56.5,6.49 56.9,6.09 56.9,5.14 57.33,4.71 R23.1 | v41.95,10.89 41.95,10.99 R15.1
  Bottom 0.152: v41.95,10.89 41.95,9.04 44.35,6.64 54.12,6.64 C12.1 56.5,6.66 v56.5,6.49
N$38  (via drill 0.35)
  Top 0.152: C15.2 48.08,22.77 48.08,22.37 47.15,21.44 45.95,21.44 44.8,20.29 44.8,19.94 v42.55,17.69 U$4.5
  Bottom 0.152: v42.55,17.69 43.42,16.82 R16.2
N$39  (via drill 0.35)
  Top 0.152: R18.2 45.89,22.81 C15.1 46.17,22.84 v46.17,24.41
  Bottom 0.152: C16.2 44.53,26.01 46.15,24.39 v46.17,24.41
N$40
  Top 0.152: R37.2 R40.2 42.16,14.9 44.3,17.04 U$4.6
N$41
  Top 0.152: R34.2 57.81,19.8 R27.1 57.81,21.62 57.14,22.29 55.7,22.29 55.22,22.77 C18.1
N$42
  Top 0.152: U$4.10 54.52,17.69 56.42,15.79 56.92,15.79 C17.1 57.93,16.8 R34.1
N$43  (via drill 0.35)
  Top 0.152: v43.8,11.04 43.8,9.61 R5.2 42.72,8.11 v41.9,7.29 | v50.85,15.24 53.15,15.24 53.65,15.74 53.65,16.64 53.25,17.04 U$4.9 | R33.2 42.55,46.01 v42.55,42.34
  Bottom 0.152: v43.8,11.04 48,15.24 v50.85,15.24 | v42.55,42.34 40.05,39.84 40.05,9.14 v41.9,7.29
N$44
  Top 0.152: RED1.1 40.98,50.32 R31.1
N$45
  Top 0.152: R28.1 42.95,51.8 BLUE1.1
N$46
  Top 0.152: U$6.P$1 49.75,45.54 49.75,32.74 49.1,32.09 45.15,32.09 44.1,31.04 44.1,29.19 44.61,28.68 C3.2 45.45,28.19 46.72,28.19 IC6.3
N$96
  Top 0.152: IC13.2 84.36,40.99 C42.1
N$97
  Top 0.152: IC13.4 83.82,38.45 C42.2
N$98  (via drill 0.35)
  Top 0.152: R94.2 86.28,14.79 IC14.4 86.42,18.35 v87.2,17.56
  Bottom 0.152: v87.2,17.56 87.2,17.51 91.95,17.51 93.18,18.73 93.18,22.38 93.86,23.06 93.86,25.81 PAD9.1
N$99  (via drill 0.35)
  Top 0.152: IC14.3 83.59,18.16 82,18.16 v82,18.21 | v79.9,19.33 79.12,20.11 R101.1 78.89,20.38 78.19,21.07 v78,20.87 | v78.31,22.55 78.31,28.36 R97.1
  Bottom 0.152: v82,18.21 81,18.21 80.06,19.16 80.06,19.18 v79.9,19.33 | v78,20.87 v78,20.88 78,22.25 v78.31,22.55
N$100  (via drill 0.35)
  Top 0.152: U$14.P$1 78.41,10.86 73.7,15.56 73.7,18.26 74.11,18.66 v74.11,18.71 | v72.56,19.46 72.16,19.06 71.09,19.06 C39.1 71.03,18.48 70.86,18.31 70.86,17.46 71.52,16.79 IC15.2
  Bottom 0.152: v74.11,18.71 73.31,18.71 v72.56,19.46
N$101  (via drill 0.35)
  Top 0.152: C43.2 75.23,12.68 74.36,13.56 v74.42,13.62 | v76,14.36 77.66,14.36 IC15.5
  Bottom 0.152: v74.42,13.62 75.16,14.36 v76,14.36
N$102
  Top 0.152: IC15.1 74.11,19.83 R98.1
N$103
  Top 0.152: R98.2 77.77,18.18 IC15.8
N$104
  Top 0.152: LO_PASS4.1 76.5,49.46 C44.2 76.75,46.01 76.75,45.21 77.81,44.16 77.81,41.71 77.98,41.53 77.98,39.96 76.31,38.29 76.31,35.76 76.7,35.36 U$13.1 77.81,35.36 77.86,35.31 78.2,35.31 78.66,34.86 79.97,34.86 81.32,36.21 83.51,36.21 86.09,33.63 R86.1 R91.1
N$105  (via drill 0.35)
  Top 0.152: AMP_OUT4.1 81.75,51.36 85.61,47.51 85.61,41.96 85.45,41.81 v85.48,41.78 | v81.25,34.81 81.81,35.36 U$13.14 | v90.41,24.06 90.68,23.78 90.68,22.6 R88.2 | v85.22,37.67 v85.22,35.79 85.22,35.73 85.83,35.13 R100.1
  Bottom 0.152: v85.22,35.79 84.74,35.31 81.75,35.31 v81.25,34.81 81.25,33.16 80.56,32.46 80.56,30.21 84.66,26.11 88.25,26.11 90.36,24.01 v90.41,24.06 | v85.48,41.78 85.48,37.93 v85.22,37.68 v85.22,37.67
N$106  (via drill 0.35)
  Top 0.152: R86.2 87.44,33.64 R100.2 87.44,35.14 87.44,36.15 v86.67,36.91 | v80.5,33.65 81,33.65 82.06,34.71 U$13.13
  Bottom 0.152: v86.67,36.91 82.19,36.91 80.45,35.18 80.45,33.7 v80.5,33.65
N$107  (via drill 0.35)
  Top 0.152: U$13.2 77.91,34.71 80,32.61 80,31.86 81.56,30.31 82.86,30.31 83.19,29.98 R90.2 v84.63,29.18 | v88.5,33.36 88.5,32.92 R91.2
  Bottom 0.152: v84.63,29.18 85.38,29.18 85.95,29.76 87.25,29.76 87.87,29.14 87.87,26.99 88.16,26.71 88.75,26.71 89.45,27.41 89.45,30.06 89.81,30.41 90.56,30.41 91.2,31.06 91.2,32.16 90.06,33.31 88.56,33.31 v88.5,33.36
N$108
  Top 0.152: C45.2 76.92,42.34 R87.2 76.92,40.04 75.66,38.77 75.66,34.36 76.11,33.91 76.83,33.91 U$13.3
N$109  (via drill 0.35)
  Top 0.152: C44.1 70.66,46.41 70.66,43.06 73.08,40.63 R87.1 75.78,40.78 v75.78,41.88 | R83.1 79.67,40.61 v78.81,40.61
  Bottom 0.152: v78.81,40.61 77.11,40.61 75.81,41.91 v75.78,41.88
N$110  (via drill 0.35)
  Top 0.152: R84.2 76.83,27.29 75.39,28.73 C46.2 75.04,30.17 78.28,30.17 v78.35,30.11 | U$13.5 77.11,32.88 v78.26,32.88
  Bottom 0.152: v78.26,32.88 78.01,32.63 78.01,30.45 v78.35,30.11
N$111  (via drill 0.35)
  Top 0.152: C47.2 86.22,48.4 84.36,50.26 v84.31,50.26 | v74.98,39.54 74.98,38.51 R85.2 72.66,36.19 72.66,31.19 71.69,30.23 C46.1
  Bottom 0.152: v84.31,50.26 79.75,50.26 75.02,45.52 75.02,39.54 v74.98,39.54
N$112  (via drill 0.35)
  Top 0.152: v77.09,37.82 77.19,37.73 R102.2 78.45,37.73 78.45,36.01 v78.83,35.63 | U$13.6 78.86,32.11 v78.95,32.01 | v74.02,38.76 73.84,38.93 R99.2
  Bottom 0.152: v77.09,37.82 77.09,37.87 76.2,38.76 v74.02,38.76 | v78.95,32.01 79.08,32.13 79.08,35.25 78.83,35.5 v78.83,35.63
N$113  (via drill 0.35)
  Top 0.152: v89.11,21.36 89.48,21.73 R88.1 89.75,22.77 89.75,24.46 91.38,26.08 92.6,26.08 93.52,27 93.52,27.82 93.23,28.11 89.72,28.11 88.64,29.18 R96.2 | v85.47,22.14 85.67,22.14 86.31,22.78 C49.1
  Bottom 0.152: v89.11,21.36 88.33,22.14 v85.47,22.14
N$114  (via drill 0.35)
  Top 0.152: U$13.10 83.56,32.76 84.75,31.56 84.75,30.51 85.66,29.61 85.66,28.51 85.05,27.9 v84.76,27.9 82.38,27.9 C48.1 | v87.06,28.3 87.06,29.04 R96.1
  Bottom 0.152: v84.76,27.9 85.17,28.3 v87.06,28.3
N$115  (via drill 0.35)
  Top 0.152: R95.2 90.88,30.36 90.88,34.45 R82.2 90.27,34.55 90.27,32.02 v89.7,31.46 | v81.36,32.06 81.41,32.11 U$13.9
  Bottom 0.152: v89.7,31.46 89.36,31.46 88.75,32.06 v81.36,32.06
N$116
  Top 0.152: R92.1 RED4.1
N$117
  Top 0.152: R89.1 90.99,48.86 BLUE4.1
N$118  (via drill 0.35)
  Top 0.152: v73.31,21.96 71.06,21.96 70.66,21.56 70.66,19.27 70.67,19.26 C39.2 70.16,18.62 70.16,15.81 70.5,15.46 72.28,15.46 IC15.3 | U$15.P$1 82.31,45.56 82.31,45.41 82,45.71 U$15.P$1
  Bottom 0.152: U$15.P$1 82,41.61 77.39,36.99 74.24,36.99 73.13,35.88 73.13,26.48 74.43,25.18 74.43,22.33 74.06,21.96 v73.31,21.96
N$119  (via drill 0.35)
  Top 0.152: SDA1.1 84.55,5.36 85.7,6.52 85.7,12.46 81.61,16.56 80.2,16.56 80.11,16.47 v80.11,16.4
  Bottom 0.152: v80.11,16.4 80.11,18.03 78.88,19.27 78.88,21.1 79.49,21.71 79.49,23.66 IMU1.SDA
N$120  (via drill 0.35)
  Top 0.152: SCL1.1 77.55,8.32 v77.55,9.71
  Bottom 0.152: v77.55,9.71 78.06,10.22 78.06,18.93 77.03,19.96 IMU1.SCL
N$121
  Top 0.152: R93.1 ORANGE1.1
PIN1  (via drill 0.35)
  Top 0.152: R40.1 40.97,19.59 R18.1 | v41.95,14.24 41.95,13.95 42.73,13.17 R15.2 | v41.95,16.19 R40.1 | HI_PASS1.1 46.45,7.19 v46.25,7.39 | R40.1 40.3,16.87 40.3,18.34 39.95,18.69 39.95,20.69 41.1,21.84 v43.95,21.84 | v48,16.39 U$4.7
  Bottom 0.152: v41.95,16.19 v41.95,14.24 41.95,13.54 43.05,12.44 43.05,10.59 v46.25,7.39 | v43.95,21.84 43.95,20.44 v48,16.39
PIN4  (via drill 0.35)
  Top 0.152: v77,48.76 77,46.86 78.45,45.41 78.45,43.66 80.98,41.13 R83.2 80.98,38.57 R102.1 80.14,36.56 79.76,36.17 v79.81,36.12 | v79.75,30.88 77.56,30.88 U$13.7 | v75.53,49.83 75.5,49.81 73.95,51.36 HI_PASS4.1 | R85.1 71.64,37.18 72.5,38.04 72.5,40.11 v72.41,40.21
  Bottom 0.152: v77,48.76 77,48.66 76.7,48.66 v75.53,49.83 | v79.81,36.12 79.71,36.02 79.71,30.92 v79.75,30.88 | v72.41,40.21 73.61,41.41 73.61,49.71 71.95,51.36 HI_PASS4.1
PIN7  (via drill 0.35)
  Top 0.152: R9.1 6.97,19.59 R12.1 | v7.95,14.24 7.95,13.95 8.73,13.17 R10.2 | v7.95,16.19 R9.1 | HI_PASS.1 12.45,7.19 v12.25,7.39 | R9.1 6.3,16.87 6.3,18.34 5.95,18.69 5.95,20.69 7.1,21.84 v9.95,21.84 | v14,16.39 U$1.7
  Bottom 0.152: v7.95,16.19 v7.95,14.24 7.95,13.54 9.05,12.44 9.05,10.59 v12.25,7.39 | v9.95,21.84 9.95,20.44 v14,16.39
RAWEMG  (via drill 0.35)
  Top 0.152: v11.1,15.09 11.35,14.84 11.35,7.24 RAWEMG.1 | IC3.6 16.61,28.2 v16.15,27.74
  Bottom 0.152: v16.15,27.74 15.64,28.25 C7.1 10.28,28.25 9.2,27.17 9.2,18.19 11.1,16.29 v11.1,15.09
RAWEMG1  (via drill 0.35)
  Top 0.152: v45.1,15.09 45.35,14.84 45.35,7.24 RAWEMG1.1 | IC6.6 50.62,28.2 v50.15,27.74
  Bottom 0.152: v50.15,27.74 49.64,28.25 C16.1 44.28,28.25 43.2,27.17 43.2,18.19 45.1,16.29 v45.1,15.09
RAWEMG4  (via drill 0.35)
  Top 0.152: RAWEMG4.1 86.5,50.81 88.11,49.21 88.11,47.72 C47.1 86.89,45.84 86.23,45.18 v86.38,45.03 | v76.03,15.48 77.73,15.48 IC15.6
  Bottom 0.152: v86.38,45.03 77.61,36.26 74.45,36.26 73.81,35.61 73.81,27.06 75.33,25.54 75.33,16.19 v76.03,15.48

## Text on the board
tPlace: Multi-modal Myography / EMG_FSR_IMU / v1.13
tNames: EMG | FSR | EMG | FSR | RED | BLUE | 24K | RED | BLUE | 24K | 150R | 100R | 150R | 100R | 24K | 24K | Multi-modal Myography / EMG_FSR / v1.13 | Multi-modal Myography / EMG_FSR / v1.13 | TC7760 DC-DC | TC7760 DC-DC | AD8677 FSR | AD8677 FSR | 16K | 16K | INA118U IA | 787K | INA118U IA | 787K | GND | GND | GND | GND | 10pF | 10pF | 22nF | 3.3nF | 22nF | 3.3nF | VCC | VCC | VCC | VCC | 68K | 68K | 390K | TLC2274 4OpAmp | 390K | TLC2274 4OpAmp | 16K | 100K | 68K | 16K | 100K | 68K | 51K | 68K | 51K | 68K | 3.3nF | 3.3nF | 1K | 1K | 51K | 75K | 51K | 75K | 24K | RAW_EMG | HI_PASS | LO_PASS | AMP_OUT | VCC- | 68K | 24K | RAW_EMG | HI_PASS | LO_PASS | AMP_OUT | VCC- | 68K
bNames: 10uF | 10uF | 4.7K | 4.7K | 22nF | 22nF | 10uF | 10uF | 3.3nF | 3.3nF | 390K | 390K | 3.3nF | 3.3nF
tValues: HI_PASS | LO_PASS | AMP_OUT | RAW_EMG | VCC- | 3.3nF | 100R | -5V | 100R | 3.3V | 22nF | 3.3nF | 150R | 5V | TC7760 DC-DC | 68K | 68K | 51K | 10uF | 16K | 390K | TLC2274 4OpAmp | 100K | 1uF | 75K | 1K | GND | GND | 1uF | 24K | 22nF | 787K | 68K | 24K | 390K | 3.3nF | 3.3nF | VCC | VCC | 68K | 10pF | 4.7K | 16K | AD8677 FSR | INA118U EMG | +3.3V | 24K | 10uF | AZ1117 +3.3V | EMG_OUT | SCL | SDA | FSR_OUT